# Altium PCB shkb_lite.PcbDoc (part 2 of 2)
Units mm, origin at the board's own origin, x right, y up, seen from the top; angles counter-clockwise.
Board outline 141.5 x 36 mm, 2 copper layers (Top Layer, Bottom Layer), stack 1.57 mm thick; 74 components, 53 nets, 368 pads, 293 vias.
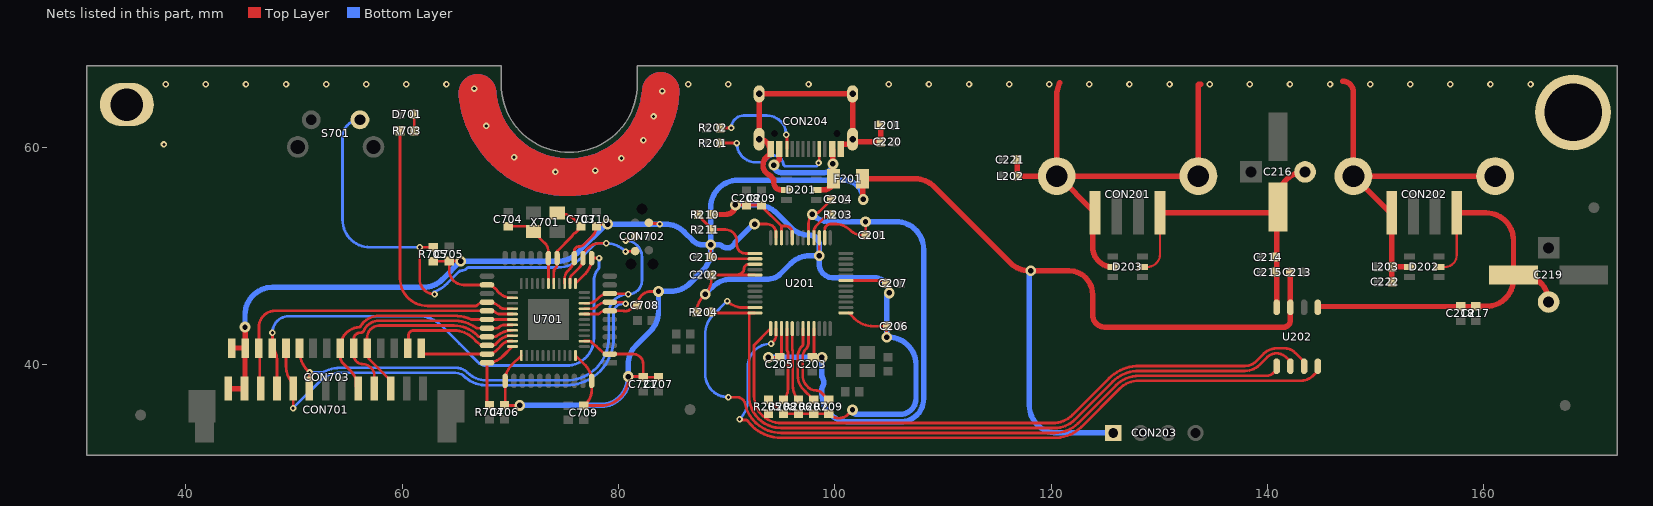
[diagram p2: the nets of this part, all layers, seen from the top]

## Via types
v1: diameter 0.6, hole 0.3, Top Layer to Bottom Layer, tented both sides, 262 vias
v2: diameter 1, hole 0.5, Top Layer to Bottom Layer, tented both sides, 22 vias
v3: diameter 0.6, hole 0.3, Top Layer to Bottom Layer, 9 vias

## Nets (pads, with @x,y where several pads share a name; then routed paths per layer and width w, separated by ;. In a path a pad name is that pad's centre, name@x,y a point inside that pad or via, vN(x,y) a via of type N, cw(c..) or ccw(c..) an arc to the next point about the centre after c; other vN are vias at no path point) (continued)
NetC703_2: C703.2 U701.16 X701.1 | length 9.1
  Top Layer w0.254: U701.16@74.015,47.467 74.015,48.526 cw(c74.537,48.526) 74.168,48.895 ccw(c73.812,49.251) 74.315,49.251 U701.16@74.315,49.817 74.362,49.864 74.362,50.486 75.665,51.789 ccw(c75.485,51.968) 75.713,51.857 cw(c76.327,51.562) 76.032,52.176 ccw(c75.921,52.404) 76.1,52.224 76.276,52.4 ccw(c76.096,52.579) 76.337,52.498 76.24,52.498 76.461,52.585 ccw(c76.275,52.771) C703.2@76.538,52.771 76.513,52.771 76.24,53.044 76.24,53.069 75.957,53.351 ccw(c74.473,51.867) 74.473,53.966 X701.1@74.336,53.966
NetC704_2: C704.2 U701.17 X701.3 | length 7.9
  Top Layer w0.254: C704.2@69.807,52.771 71.531,52.771 72.036,52.266 X701.3@72.136,52.266 73.173,51.23 cw(c72.345,50.402) 73.515,50.402 U701.17@73.515,49.817 U701.17@73.515,47.467
NetCON204_A5: CON204.A5 R201.1 | length 12.6
  Top Layer w0.254: R201.1@89.423,60.452 v1(90.932,60.452) ; v1@98.425,58.547 v1(98.495,58.617) 98.565,58.687 CON204.A5@98.565,59.9
  Bottom Layer w0.254: v1(90.932,60.452) ccw(c92.71,60.452) 90.99,60.002 ccw(c92.71,60.452) 92.258,58.732 ccw(c92.71,60.452) 92.71,58.674 93.347,58.674 ccw(c93.346,58.928) 93.573,58.813 cw(c94.361,58.42) 94.534,59.284 ; 94.361,59.301 cw(c94.361,58.42) 95.236,58.523 ccw(c95.488,58.554) 95.487,58.3 98.178,58.3 ccw(c98.178,58.617) v1(98.495,58.617)
NetCON204_B5: CON204.B5 R202.1 | length 9.1
  Top Layer w0.254: R202.1@89.408,61.849 v1(90.424,61.849) ; v1(95.504,61.214) cw(c95.504,61.153) 95.565,61.153 CON204.B5@95.565,59.9
  Bottom Layer w0.254: v1(90.424,61.849) cw(c91.567,61.849) 91.567,62.992 93.726,62.992 cw(c93.726,61.214) v1(95.504,61.214)
NetD701_2: D701.2 R703.2 | length 1.5
  Top Layer w0.254: R703.2@61.102,61.595 D701.2@61.102,63.119
NetR203_2: R203.2 U201.28 | length 3
  Top Layer w0.254: U201.28@98.065,51.698 98.065,52.26 cw(c98.882,52.26) 98.304,52.838 99.055,53.589 cw(c99.68,52.964) 99.069,53.603 cw(c99.68,52.964) R203.2@99.68,53.848
NetR206_1: R206.1 U201.5 | length 6.7
  Top Layer w0.254: U201.5@96.065,43.298 96.065,41.375 ccw(c96.319,41.376) 96.077,41.298 cw(c95.335,41.055) 96.116,41.055 96.116,38 ccw(c97.929,38) R206.1@96.647,36.718
NetR207_1: R207.1 U201.7 | length 7.3
  Top Layer w0.254: U201.7@97.065,43.298 97.065,41.877 cw(c96.811,41.877) 97.012,41.722 cw(c96.641,42.01) 96.972,41.677 ccw(c97.948,40.704) 96.785,41.443 ccw(c97.948,40.704) 96.595,40.964 ccw(c97.948,40.704) 96.57,40.704 96.57,38.937 ccw(c98.369,38.937) 97.096,37.666 ccw(c98.369,38.937) 97.098,37.664 ; 97.098,37.664 97.223,37.539 ; 97.223,37.539 ccw(c98.19,38.503) 97.225,37.537 ccw(c98.19,38.503) 97.305,37.463 cw(c97.141,37.27) 97.353,37.409 97.746,37.016 97.746,36.991 98.019,36.718 R207.1@98.044,36.718
NetR208_1: R208.1 U201.4 | length 7.3
  Top Layer w0.254: R208.1@95.25,36.718 ccw(c94.255,37.713) 95.662,37.713 95.662,41.055 ; U201.4@95.565,43.298 95.565,41.375 ccw(c95.819,41.376) 95.607,41.237 cw(c95.335,41.055) 95.662,41.055 ; 95.662,40.513 95.662,41.055
NetR209_1: R209.1 U201.8 | length 7.8
  Top Layer w0.254: U201.8@97.565,43.298 97.565,42.01 cw(c96.641,42.01) 97.295,41.358 ccw(c97.948,40.704) 97.024,40.704 97.024,38.937 ccw(c98.369,38.937) 97.418,37.986 97.545,37.859 ccw(c98.19,38.503) 98.19,37.592 cw(c98.19,36.741) 98.791,37.343 R209.1@99.28,36.855
NetR210_2: R210.2 R211.2 U201.37 | length 7.3
  Top Layer w0.254: R210.2@87.361,53.848 87.634,53.575 87.634,53.503 88.661,52.476 R211.2@88.661,52.451 89.871,52.451 cw(c89.871,51.39) 90.932,51.39 90.932,51.054 ccw(c91.738,51.054) 91.738,50.248 U201.37@92.615,50.248
NetR704_2: R704.2 U701.33 | length 6.9
  Top Layer w0.254: R704.2@68.072,36.21 67.84,36.442 U701.33@67.84,40.142 ccw(c67.84,42.194) 69.291,40.743 U701.33@70.19,41.642
OVCB1: R204.1 U201.48 U202.2 | length 69.9
  Top Layer w0.254: R204.1@88.534,44.831 88.617,44.748 U201.48@92.075,44.748 ; 92.091,36.765 ccw(c95.04,37.074) 95.04,34.109 120.344,34.109 ccw(c120.344,36.649) 122.14,34.853 125.664,38.377 cw(c128.104,35.941) 125.668,38.381 cw(c128.104,35.941) 127.87,39.381 cw(c128.071,36.849) 128.071,39.389 137.922,39.389 ccw(c137.922,41.275) 139.254,39.94 ccw(c137.922,41.275) 139.257,39.943 139.981,40.667 cw(c140.836,39.811) 140.836,41.021 cw(c140.836,39.811) 141.691,40.667 142.113,40.245 U202.2@142.113,39.82 ; U201.48@92.615,44.748 92.096,44.748 92.075,44.727 92.075,37.074 ccw(c95.04,37.074) 92.837,35.089 ccw(c95.04,37.074) 92.859,35.065 ; 93.319,34.659 ccw(c95.04,37.074) 94.554,34.149
OVCB2: R205.1 U201.1 U202.3 | length 62.5
  Top Layer w0.254: U201.1@94.065,43.298 92.529,41.762 92.529,37.074 ccw(c95.04,37.074) 95.04,34.563 120.156,34.563 ccw(c120.156,37.103) 121.952,35.307 125.342,38.697 cw(c128.104,35.941) 125.348,38.703 cw(c128.104,35.941) 127.836,39.834 cw(c128.071,36.849) 128.071,39.843 137.922,39.843 ccw(c137.922,41.275) 138.934,40.263 139.659,40.987 cw(c140.836,39.811) 139.661,40.989 cw(c140.836,39.811) 140.836,41.475 141.591,41.475 cw(c141.591,40.118) 142.55,41.077 143.383,40.245 U202.3@143.383,39.82
PB0: CON701.9 CON703.5 U701.8 | length 48.1
  Top Layer w0.254: CON703.5@49.255,41.502 49.255,39.837 ccw(c51.532,39.837) 49.922,38.227 CON701.9@49.922,37.749 49.916,37.744 49.916,35.946 v1(49.911,35.941) ; U701.8@76.84,45.142 77.503,45.142 ccw(c77.503,45.814) 77.978,45.339 cw(c78.951,44.366) 78.951,45.742 U701.8@79.19,45.742 80.402,45.742 80.551,45.593 v1(80.645,45.593)
  Bottom Layer w0.254: v1(49.911,35.941) 52.45,38.48 cw(c54.246,36.684) 54.246,39.224 64.574,39.224 cw(c64.574,36.259) 65.46,39.089 cw(c65.384,38.846) 65.517,39.063 cw(c64.95,38.148) 65.716,38.904 65.81,38.81 65.847,38.773 cw(c65.728,38.548) 65.891,38.743 ccw(c67.756,40.956) 67.282,38.101 ; 66.614,38.297 ccw(c67.756,40.956) 67.282,38.101 ; v1(80.645,45.593) 80.391,45.593 ccw(c80.391,44.742) 79.587,45.022 ccw(c79.828,44.94) 79.582,45.004 ccw(c80.899,44.669) 79.54,44.669 79.54,42.383 cw(c78.867,42.383) 79.54,42.361 ccw(c79.794,42.355) 79.54,42.359 cw(c75.184,42.418) 79.531,42.134 79.531,42.064 cw(c78.823,42.065) 79.51,41.896 ccw(c79.757,41.836) 79.505,41.87 cw(c75.184,42.418) 75.184,38.062 67.568,38.062 cw(c67.568,38.516) 67.471,38.073 67.453,38.076 ccw(c67.399,37.828) 67.426,38.081 cw(c67.756,40.956) 67.282,38.101
PB1: CON701.8 CON702.3 CON703.6 U701.9 | length 51.7
  Top Layer w0.254: CON703.6@50.505,40.831 CON703.6@50.505,41.226 ; CON703.6@50.505,41.502 CON703.6@50.505,41.226 ; CON701.8@51.422,37.749 51.428,37.756 51.428,39.223 v1@51.422,39.23 ; v1(51.435,39.243) 51.248,39.43 cw(c53.045,41.226) CON703.6@50.505,41.226 ; U701.9@76.84,45.642 77.177,45.642 ccw(c77.177,46.775) 77.978,45.974 78.091,46.087 cw(c79.19,44.987) U701.9@79.19,46.542 79.22,46.512 80.869,46.512 v1(80.899,46.482) ; v1(80.645,51.435) ccw(c80.645,52.661) 81.512,51.794 CON702.3@81.534,51.816
  Bottom Layer w0.254: v1(51.435,39.243) 52.623,39.243 ccw(c52.622,39.497) 52.749,39.277 cw(c54.246,36.684) 54.246,39.678 64.762,39.678 cw(c64.762,36.682) 65.399,39.609 cw(c65.345,39.361) 65.423,39.603 cw(c64.95,38.148) 66.035,39.227 ccw(c67.756,40.956) 67.512,38.528 67.568,38.516 68.027,38.516 ccw(c68.03,40.977) 68.03,38.516 68.032,38.516 75.184,38.516 ccw(c75.184,42.418) 79.061,41.977 ccw(c78.823,42.065) 79.077,42.064 79.077,42.142 cw(c79.331,42.141) 79.077,42.157 ccw(c75.184,42.418) 79.086,42.37 cw(c79.34,42.365) 79.086,42.374 ccw(c78.867,42.383) 79.086,42.383 79.086,44.669 cw(c80.899,44.669) v1(80.899,46.482) ccw(c80.899,47.752) 82.169,47.752 82.169,49.911 ccw(c80.645,49.911) v1(80.645,51.435)
PB4: CON701.5 CON703.9 U701.28 | length 22.9
  Top Layer w0.254: U701.28@70.19,44.142 U701.28@67.84,44.142 66.447,44.142 cw(c66.448,44.396) 66.348,44.163 ccw(c64.788,40.586) 64.788,44.488 57.881,44.488 ccw(c57.881,42.454) 56.509,43.956 56.485,43.934 ccw(c56.655,43.745) 56.475,43.925 56.445,43.895 ccw(c57.881,42.454) 56.107,43.449 cw(c56.011,43.684) 56.027,43.431 ccw(c56.134,41.555) 54.398,42.275 54.255,41.555 CON703.9@54.255,41.502 54.255,40.773 ccw(c55.251,40.773) 54.546,40.069 55.123,39.492 55.254,39.361 cw(c53.642,37.749) CON701.5@55.699,38.733 ; CON701.5@55.699,38.733 cw(c53.642,37.749) CON701.5@55.922,37.749 55.699,37.972 CON701.5@55.699,38.733
PB5: CON701.4 CON703.10 U701.29 | length 22.2
  Top Layer w0.254: CON701.4@57.422,38.124 57.422,38.989 ccw(c56.533,38.989) 57.161,39.617 57.046,39.732 ccw(c56.388,39.074) 57.045,39.733 ccw(c56.388,39.074) 56.388,40.005 cw(c56.388,40.888) 55.505,40.888 CON703.10@55.505,41.502 55.505,42.297 cw(c56.134,42.297) 56.134,42.926 56.198,42.926 ccw(c56.196,43.18) 56.429,43.079 cw(c57.881,42.454) 57.881,44.034 64.788,44.034 cw(c64.788,40.586) 66.347,43.662 ; 65.224,44.006 cw(c64.788,40.586) 66.347,43.662 ; U701.29@70.19,43.642 69.464,43.642 ccw(c69.464,42.931) 68.961,43.434 cw(c68.739,43.656) 68.739,43.342 U701.29@67.84,43.342 66.942,43.342 cw(c66.943,43.596) 66.796,43.389 ccw(c64.788,40.586) 66.759,43.415 ccw(c64.788,40.586) 66.347,43.662
PB6: CON701.3 CON703.11 U701.30 | length 21.3
  Top Layer w0.254: CON701.3@58.922,37.749 58.922,38.499 56.977,40.444 cw(c57.514,40.981) 56.755,40.981 CON703.11@56.755,41.502 56.755,42.454 cw(c57.881,42.454) 57.881,43.58 64.788,43.58 cw(c64.788,40.586) 66.904,42.704 cw(c64.788,40.586) 66.906,42.703 ; 65.885,43.372 cw(c64.788,40.586) 66.906,42.703 ; U701.30@70.19,43.142 ccw(c70.19,41.616) 69.837,43.101 cw(c69.779,43.348) 69.784,43.094 ccw(c69.79,42.642) 69.673,43.079 cw(c69.608,43.324) 69.657,43.075 ccw(c69.883,41.877) 69.269,42.93 cw(c69.142,43.15) 69.242,42.917 ccw(c69.902,41.35) 69.011,42.798 ccw(c69.902,41.35) 68.815,42.657 cw(c68.654,42.853) 68.762,42.624 cw(c68.394,43.414) 68.394,42.542 U701.30@67.84,42.542 67.171,42.542 cw(c67.171,42.796) 67.024,42.589 cw(c67.171,42.796) 66.992,42.616 66.906,42.703
PB7: CON701.10 CON703.4 U701.12 | length 50.1
  Top Layer w0.254: CON703.4@48.005,41.502 cw(c46.998,40.496) 48.422,40.496 CON701.10@48.422,37.749 ; CON703.4@48.005,41.503 v1(48.006,42.926) ; U701.12@76.015,47.467 76.914,48.366 ccw(c75.463,49.817) U701.12@77.515,49.817 77.521,49.822 v1(78.201,49.822)
  Bottom Layer w0.254: v1(48.006,42.926) cw(c49.53,42.926) 49.53,44.45 61.498,44.45 cw(c61.498,41.456) 63.614,43.574 cw(c61.498,41.456) 63.616,43.572 65.278,41.91 66.995,40.193 ccw(c67.756,40.956) 67.756,39.878 75.184,39.878 ccw(c75.184,42.418) 77.724,42.418 77.724,47.698 cw(c79.502,47.698) 78.142,48.843 ; 78.142,48.844 ccw(c77.947,49.006) 78.201,49.005 v1(78.201,49.822)
PC6: CON703.14 U701.31 | length 11.9
  Top Layer w0.254: CON703.14@60.505,41.502 60.579,41.577 60.579,42.672 cw(c61.033,42.672) 61.033,43.126 64.788,43.126 cw(c64.788,40.586) 66.584,42.382 66.88,42.086 ccw(c67.71,42.915) 67.381,41.789 ccw(c67.71,42.915) 67.71,41.742 U701.31@67.796,41.742 ; U701.31@67.84,41.742 U701.31@67.796,41.742 ; U701.31@70.19,42.642 69.883,42.642 ccw(c69.883,41.877) 69.479,42.527 cw(c69.346,42.743) 69.441,42.508 ccw(c69.902,41.35) 69.098,42.302 ccw(c69.902,41.35) 69.02,42.23 68.65,41.861 cw(c68.471,42.041) 68.471,41.787 67.806,41.787 ccw(c67.808,41.533) 67.796,41.786 U701.31@67.796,41.742
PC7: CON703.15 U701.32 | length 9.3
  Top Layer w0.254: CON703.15@61.755,41.502 61.755,41.165 61.978,40.942 U701.32@67.84,40.942 ccw(c67.84,42.231) 68.752,41.32 69.342,41.91 cw(c69.902,41.35) 69.902,42.142 U701.32@70.19,42.142
PD6: R703.1 U701.26 | length 25.7
  Top Layer w0.254: R703.1@59.802,61.595 59.802,47.936 ccw(c62.342,47.936) 62.342,45.396 66.76,45.396 ccw(c66.76,45.635) 66.929,45.466 cw(c67.596,44.799) 67.596,45.742 U701.26@67.84,45.742 67.937,45.742 cw(c67.937,44.188) 69.036,45.287 ccw(c69.385,45.636) 69.385,45.142 U701.26@70.19,45.142
PD7: CON701.11 CON703.3 U701.27 | length 30.1
  Top Layer w0.254: CON701.11@46.922,37.749 46.838,37.833 46.838,41.419 CON703.3@46.755,41.502 46.755,43.453 cw(c48.244,43.453) 48.244,44.942 U701.27@67.84,44.942 68.312,44.942 cw(c68.312,44.563) 68.58,44.831 ccw(c69.036,45.287) 69.036,44.642 U701.27@70.19,44.642
PORT1_PWR: C214.2 C215.2 C216.1 CON201.1 D203.5 U202.8 | length 31.1
  Top Layer w0.203: D203.5@128.433,49 128.893,49 ccw(c128.893,50.165) 130.058,50.165 CON201.1@130.058,54
  Top Layer w0.5: CON201.1@130.058,54 C216.1@140.843,54 ; U202.8@140.843,45.27 C216.1@140.843,54 ; C216.1@140.97,54.102 140.868,54 C216.1@140.843,54 ; C216.1@143.47,57.785 ccw(c143.47,55.285) 140.97,55.285 C216.1@140.97,54.535 140.843,54.408 C216.1@140.843,54
PORT2_PWR: C217.2 C218.2 C219.1 CON202.1 D202.5 U202.5 | length 40.7
  Top Layer w0.203: D202.5@155.868,49 156.411,49 ccw(c156.411,50.083) 157.493,50.083 CON202.1@157.493,54
  Top Layer w0.5: U202.5@144.653,45.27 144.653,45.293 144.699,45.339 C217.2@159.258,45.339 ; CON202.1@157.493,54 160.199,54 cw(c160.199,51.46) 162.739,51.46 C219.1@162.739,48.26 ; C217.2@159.258,45.354 160.199,45.354 ccw(c160.199,47.894) 162.739,47.894 C219.1@162.739,48.26 ; C219.1@165.989,45.76 ccw(c163.489,45.76) 163.489,48.26 C219.1@162.739,48.26
PWRB1: U201.47 U202.1 | length 68.3
  Top Layer w0.254: v1(90.043,45.847) ccw(c91.489,47.293) 91.489,45.248 U201.47@92.615,45.248 ; v1(90.162,36.958) 90.906,36.958 cw(c90.906,36.102) 91.026,36.95 cw(c90.906,36.102) 91.651,36.524 cw(c91.429,36.4) 91.679,36.447 ; 91.679,36.447 ccw(c95.04,37.074) 91.762,36.102 ccw(c95.04,37.074) 92.329,34.991 ccw(c95.04,37.074) 92.511,34.773 ccw(c95.04,37.074) 95.04,33.655 120.344,33.655 ccw(c120.344,36.649) 122.46,34.531 ccw(c120.344,36.649) 122.462,34.533 125.987,38.057 cw(c128.104,35.941) 125.988,38.059 cw(c128.104,35.941) 128.104,38.935 139.898,38.935 ccw(c139.898,39.88) 140.566,39.212 140.843,39.489 U202.1@140.843,39.82
  Bottom Layer w0.254: v1(90.043,45.847) 88.755,44.559 ccw(c90.551,42.763) 88.011,42.763 88.011,39.109 ccw(c90.162,39.109) v1(90.162,36.958)
PWRB2: U201.2 U202.4 | length 69.5
  Top Layer w0.254: v1(91.186,34.925) 91.252,34.859 91.734,34.859 cw(c91.733,34.605) 91.936,34.757 ccw(c95.04,37.074) 92.176,34.467 ; 92.176,34.467 ccw(c95.04,37.074) 94.286,33.275 ; 92.182,34.46 ccw(c95.04,37.074) 95.04,33.201 120.414,33.201 ccw(c120.414,35.741) 120.833,33.236 cw(c120.873,32.985) 120.837,33.236 ccw(c120.344,36.649) 122.78,34.209 ccw(c120.344,36.649) 122.784,34.213 126.308,37.737 cw(c128.104,35.941) 128.104,38.481 143.093,38.481 ccw(c143.093,40.041) 144.196,38.938 144.653,39.395 U202.4@144.653,39.82 ; 94.332,42.135 ccw(c93.768,42.698) 94.556,42.58 ; 94.556,42.58 ccw(c93.768,42.698) 94.565,42.698 U201.2@94.565,43.298 94.556,43.289 94.556,42.58
  Bottom Layer w0.254: v1(91.186,34.925) 91.204,34.943 ccw(c89.408,36.739) 91.948,36.739 91.948,39.751 cw(c94.107,39.751) 92.493,41.185 cw(c94.107,39.751) 92.673,41.365 cw(c94.107,39.751) v1(94.107,41.91)
RAW: CON204.A4B9 CON204.B4A9 D201.5 F201.2 | length 13.1
  Top Layer w0.5: v2(94.361,58.42) 94.815,58.874 ccw(c94.694,58.995) 94.865,58.995 CON204.B4A9@94.865,59.9 CON204.B4A9@94.815,59.85 ; D201.5@98.276,56.134 99.011,56.134 ccw(c99.011,56.992) 99.869,56.992 F201.2@99.869,57.15 99.815,57.204 v2(99.815,58.527) 99.815,59.85 CON204.A4B9@99.765,59.9
  Bottom Layer w0.5: v2(94.361,58.42) ccw(c95.058,58.42) 95.058,57.723 99.011,57.723 ccw(c99.011,58.527) v2(99.815,58.527)
RST: CON702.5 R705.1 S701.1 U701.13 | length 51.2
  Top Layer w0.254: R705.1@62.873,50.82 v1(61.615,50.82) 61.615,47.859 ccw(c62.992,47.859) v1(62.992,46.482) ; U701.13@75.515,47.467 75.515,47.834 cw(c76.118,47.834) 75.692,48.26 76.338,48.906 ccw(c75.427,49.817) U701.13@76.715,49.817 76.715,50.258 77.24,50.783 cw(c78.201,49.822) 78.201,51.181 v1(78.867,51.181) ; v1(80.645,50.419) 80.669,50.443 81.51,50.443 CON702.5@81.534,50.466
  Bottom Layer w0.254: S701.1@56.093,62.602 ccw(c56.093,60.992) 54.483,60.992 54.483,53.36 ccw(c57.023,53.36) 57.023,50.82 v1(61.615,50.82) ; v1@62.919,46.698 ccw(c61.94,49.657) 64.145,47.454 65.267,48.576 cw(c65.446,48.396) 65.436,48.65 ccw(c65.405,49.53) 66.005,48.885 cw(c66.178,48.699) 66.177,48.953 74.386,48.953 ccw(c74.386,52.07) 76.591,49.867 77.831,51.107 cw(c78.01,50.927) 78.01,51.181 v1(78.867,51.181) cw(c78.867,48.728) 80.601,50.463 v1(80.645,50.419)
SHIELD: C220.2 C221.2 C222.2 CON201.4 CON201.5 CON202.4 CON202.5 CON204.A1B12 CON204.B1A12 CON204.S1 D201.2 D202.2 D203.2 L201.2 L202.2 L203.2 pad. | length 162.4
  Top Layer w0.5: 94.996,56.134 cw(c94.996,56.769) 94.361,56.769 94.361,56.895 ccw(c93.861,56.895) 94.215,57.247 94.028,57.435 ccw(c93.673,57.083) 93.902,57.527 cw(c94.361,58.42) 93.774,59.235 ccw(c93.48,59.639) 93.98,59.637 93.98,59.83 ccw(c92.995,59.83) 93.827,60.357 ccw(c92.995,59.83) CON204.S1@92.995,60.815 CON204.S1@92.995,64.995 CON204.S1@101.635,64.995 CON204.S1@101.635,60.815 ; CON204.A1B12@100.565,59.9 100.565,60.307 100.615,60.357 101.404,60.357 101.635,60.588 CON204.S1@101.635,60.815 ; L201.2@104.252,62.103 C220.2@104.252,60.579 101.871,60.579 cw(c101.871,60.815) CON204.S1@101.635,60.815 ; C221.2@116.855,58.928 L202.2@116.855,57.404 116.855,57.4 CON201.5@120.508,57.4 ; 120.777,66.04 120.508,65.152 CON201.5@120.508,57.4 ; D203.2@125.683,49 cw(c125.683,50.856) 123.827,50.856 123.827,54.231 120.764,57.294 ccw(c120.508,57.038) CON201.5@120.508,57.4 ; 133.849,65.892 133.752,65.892 cw(c133.752,65.913) 133.731,65.913 ccw(c133.731,65.79) 133.608,65.79 CON201.5@133.608,57.4 CON201.5@120.508,57.4 ; 146.939,66.167 cw(c146.939,65.163) 147.943,65.163 CON202.5@147.943,57.4 ; C222.2@151.526,47.498 cw(c151.526,47.531) 151.493,47.531 CON202.4@151.493,54 cw(c151.493,54.362) 151.237,54.106 CON202.5@147.943,57.4 ; L203.2@151.526,48.895 cw(c151.631,48.895) 151.631,49 D202.2@153.118,49 ; CON202.5@161.043,57.4 CON202.5@147.943,57.4
  Top Layer w3.5: 66.95,65.076 ccw(c75.42,65.791) v1@83.904,65.265
  Bottom Layer w3.5: 66.95,65.076 ccw(c75.42,65.791) v1@83.904,65.265
  other v1: 74.168,57.785 77.851,57.912 80.264,59.055 70.34,59.136 37.973,60.325 82.296,60.706 67.775,62.032 83.244,62.921 84.031,65.257 66.657,65.486 38.133,65.892 41.842,65.892 45.55,65.892 49.258,65.892 52.967,65.892 56.675,65.892 60.384,65.892 64.092,65.892 86.444,65.892 90.152,65.892 97.569,65.892 104.986,65.892 108.694,65.892 112.403,65.892 116.111,65.892 119.82,65.892 123.528,65.892 127.236,65.892 130.945,65.892 134.653,65.892 138.362,65.892 142.07,65.892 145.778,65.892 149.487,65.892 153.195,65.892 156.904,65.892 160.612,65.892 164.32,65.892
VCC1V8: C201.2 C203.2 C204.2 C205.2 U201.3 U201.9 U201.26 U201.29 | length 64.4
  Top Layer w0.254: v2(93.853,40.64) 94.895,40.64 ccw(c94.485,41.05) C205.2@94.91,40.655 ccw(c94.485,41.05) 95.065,41.05 U201.3@95.065,43.298 ; U201.29@97.565,51.698 97.565,53.034 cw(c98.731,53.034) v2(97.907,53.858) ccw(c97.907,54.792) 98.567,54.132 C204.2@99.68,55.245 ; C203.2@97.932,40.64 v2(98.806,40.64) ; C203.2@98.065,40.675 U201.9@98.065,43.298 ; U201.26@99.065,51.698 99.074,51.707 99.074,52.47 cw(c99.563,52.47) 99.563,52.959 100.12,52.959 cw(c100.12,51.225) 101.346,52.451 ccw(c102.572,53.677) 102.572,51.943 C201.2@102.855,51.943 ; C201.2@102.845,51.953 v2@102.845,53.173
  Top Layer w0.5: v2(102.834,53.184) v2@102.845,53.173 ; C201.2@102.845,51.953 C201.2@102.855,51.943
  Bottom Layer w0.5: v2(93.853,40.64) v2(98.806,40.64) 98.806,38.856 ccw(c99.249,39.087) 98.835,38.807 cw(c98.171,38.354) 98.87,37.957 ccw(c99.306,37.712) 98.806,37.714 98.806,37.211 ccw(c101.346,37.211) 101.078,34.685 ccw(c101.346,37.211) 101.346,34.671 106.045,34.671 ccw(c106.045,36.83) 108.204,36.83 108.204,50.644 ccw(c105.664,50.644) 105.664,53.184 v2(102.834,53.184) 99.535,53.184 cw(c99.535,55.487) v2(97.907,53.858)
VCC3V3: C202.2 C206.2 C207.2 C208.2 C209.2 R204.2 R205.2 R206.2 R207.2 R208.2 R209.2 R210.1 U201.13 U201.19 U201.27 U201.32 U201.34 U201.39 U201.41 | length 89
  Top Layer w0.254: R204.2@87.234,44.831 cw(c89.344,44.831) 87.852,46.323 v2(88.011,46.482) ccw(c86.649,47.844) 88.575,47.844 C202.2@88.575,48.26 ; C202.2@88.702,48.387 88.832,48.257 90.864,48.257 ; v2(90.805,54.737) 90.805,54.722 C208.2@91.821,54.722 C209.2@93.218,54.722 ccw(c93.462,54.722) 93.289,54.55 95.065,52.774 ; U201.41@92.615,48.248 92.606,48.257 90.864,48.257 ; U201.39@92.615,49.248 92.032,49.248 ccw(c92.032,48.808) 91.891,49.225 ccw(c92.032,48.808) 91.852,49.21 ccw(c92.032,48.808) 91.592,48.808 ccw(c92.065,48.748) 91.588,48.765 cw(c91.334,48.774) 91.584,48.726 cw(c91.164,48.809) 91.467,48.506 cw(c90.864,49.108) 90.864,48.257 ; R205.2@93.853,36.718 cw(c93.853,36.484) 93.88,36.716 cw(c93.853,36.484) 94.018,36.65 R208.2@95.25,35.418 R206.2@96.647,35.418 R207.2@98.044,35.418 R209.2@99.441,35.418 99.471,35.388 ccw(c100.367,36.284) 99.633,35.251 ccw(c100.367,36.284) 100.367,35.017 ccw(c100.367,36.223) 101.22,35.37 ; U201.34@95.065,51.698 95.065,52.774 ; U201.32@96.065,51.698 cw(c96.296,51.804) 96.056,51.72 cw(c96.296,51.804) 96.042,51.802 96.042,52.248 ccw(c95.565,52.248) 95.903,52.585 ccw(c95.565,52.248) 95.902,52.586 ccw(c95.565,52.248) 95.894,52.593 cw(c96.071,52.776) 95.885,52.603 ccw(c95.471,52.189) 95.471,52.774 95.065,52.774 ; v2(98.552,50.038) 98.558,50.044 98.558,51.692 U201.27@98.565,51.698 ; U201.19@101.015,47.748 104.51,47.748 C207.2@104.76,47.498 105.033,47.225 v2(105.033,46.605) ; 101.22,35.37 v2(101.632,35.782) ; U201.13@101.29,44.748 101.777,44.261 ccw(c103.573,46.057) 102.604,43.709 ccw(c103.573,46.057) 103.573,43.517 C206.2@104.775,43.517 ; 104.775,43.053 C206.2@104.775,43.517 ; C206.2@104.83,43.517 C206.2@104.775,43.517
  Top Layer w0.5: R210.1@88.661,53.848 89.916,53.848 ccw(c89.916,54.737) v2@90.805,54.722
  Bottom Layer w0.5: v2(88.011,46.482) 88.664,47.135 cw(c90.46,45.339) 89.408,47.651 cw(c90.46,45.339) 90.46,47.879 93.852,47.879 ccw(c93.852,49.404) 94.93,48.326 95.899,49.294 cw(c97.695,47.498) 97.695,50.038 v2(98.552,50.038) ; 91.313,54.737 92.801,54.737 cw(c92.801,52.197) 94.597,53.993 95.929,52.661 ccw(c97.663,54.396) 97.663,51.943 cw(c97.663,51.054) 98.552,51.054 v2(98.552,50.038) ; v2(101.632,35.782) ccw(c102.043,35.782) 102.043,35.371 106.045,35.371 ccw(c106.045,36.83) 107.504,36.83 107.504,39.961 ccw(c104.964,39.961) 104.964,42.501 v2(104.804,42.501) 104.804,46.376 cw(c105.033,46.376) v2(105.033,46.605) ccw(c103.632,46.605) 103.632,48.006 99.822,48.006 cw(c99.822,49.276) 98.827,48.486 cw(c99.822,49.276) 98.552,49.276 v2(98.552,50.038)
VCC5V: C210.2 C213.2 C705.2 C706.2 C707.2 C708.2 C709.2 C710.2 C721.2 CON203.1 CON701.12 CON701.13 CON702.2 CON703.1 CON703.2 F201.1 R705.2 U201.35 U201.38 U202.7 U701.2 U701.7 U701.14 U701.24 U701.34 U701.44 | length 248.3
  Top Layer w0.254: R705.2@62.873,49.52 62.883,49.53 64.331,49.53 C705.2@64.346,49.545 ; v2(65.405,49.53) 65.39,49.545 C705.2@64.346,49.545 ; U701.24@70.19,46.142 70.088,46.142 cw(c70.088,47.736) 68.961,46.609 68.821,46.749 cw(c69.001,46.928) 68.777,46.809 ccw(c68.265,46.542) 68.53,47.055 cw(c68.648,47.28) 68.477,47.092 ccw(c67.84,46.407) U701.24@67.84,47.342 65.688,47.342 cw(c65.688,48.684) 64.346,48.684 C705.2@64.346,49.545 ; v2(70.866,36.195) 69.484,36.195 C706.2@69.469,36.21 69.515,36.256 U701.34@69.515,38.467 cw(c71.567,38.467) 70.116,39.918 U701.34@71.015,40.817 ; U701.14@75.015,47.467 75.015,47.927 cw(c76.025,47.927) 75.311,48.641 75.511,48.841 ccw(c74.535,49.817) U701.14@75.915,49.817 75.915,50.474 cw(c76.323,50.474) 76.034,50.761 cw(c76.323,50.474) 76.323,50.881 76.327,50.881 ccw(c76.327,51.562) 76.808,51.08 ; U701.44@76.015,40.817 76.914,39.918 cw(c75.463,38.467) U701.44@77.515,38.467 77.515,37.574 cw(c75.837,37.574) C709.2@77.024,36.388 ; C709.2@76.792,36.18 C709.2@76.817,36.18 ; 76.809,51.08 77.579,51.851 ; U701.2@76.84,42.142 77.291,42.142 cw(c77.291,41.888) 77.471,42.067 77.537,42.001 ccw(c79.19,43.651) 77.977,41.655 78.336,41.296 ccw(c79.19,42.15) U701.2@79.19,40.942 81.359,40.942 cw(c81.359,40.023) 82.278,40.023 C721.2@82.278,38.806 ; U701.7@76.84,44.642 78.083,44.642 ccw(c78.083,44.853) 78.232,44.704 cw(c78.807,44.129) 78.807,44.942 U701.7@79.19,44.942 80.419,44.942 cw(c80.409,44.688) 80.473,44.934 ccw(c80.645,45.593) 80.645,44.912 ccw(c80.645,45.593) 81.182,45.174 cw(c81.381,45.017) 81.201,45.195 81.301,45.296 cw(c81.48,45.115) 81.48,45.369 81.482,45.369 81.746,45.491 C708.2@81.755,45.496 ; C709.2@77.024,36.387 C709.2@76.817,36.18 ; 77.58,51.852 ccw(c76.66,52.771) 77.662,51.943 ccw(c76.66,52.771) C710.2@77.96,52.771 78.148,52.959 v2(78.994,52.959) ; C708.2@81.755,45.471 cw(c83.021,45.471) 81.756,45.496 cw(c83.021,45.471) 83.021,46.736 v2(83.693,46.736) ; CON702.2@82.804,53.086 82.867,53.023 83.757,53.023 v1(83.82,52.959) ; C707.2@83.701,38.806 C721.2@82.278,38.806 ; v2(88.519,51.054) 88.519,49.967 88.586,49.947 C210.2@88.848,49.869 ; C210.2@88.575,49.911 ccw(c88.969,50.305) 88.969,49.748 U201.38@92.615,49.748 ; v2(92.583,52.959) 93.726,52.959 cw(c93.726,52.12) 94.501,52.443 cw(c94.065,52.248) 94.52,52.39 cw(c93.726,52.12) 94.565,52.12 U201.35@94.565,51.698 ; C709.2@76.817,36.18 78.359,36.18 ccw(c78.359,38.72) 80.899,38.72 v2(80.899,38.862) 82.222,38.862 C721.2@82.278,38.806
  Top Layer w0.5: CON701.13@43.922,37.749 CON701.12@45.422,37.749 45.463,37.791 45.463,41.461 CON703.2@45.505,41.502 ; CON703.1@44.255,41.502 CON703.2@45.505,41.502 ; v2(45.466,43.434) 45.485,43.415 45.485,41.522 CON703.2@45.505,41.502 ; v2(102.616,55.245) 102.569,55.292 F201.1@102.569,57.15 107.406,57.15 cw(c107.406,54.61) 109.202,56.406 116.223,49.385 ccw(c118.019,51.181) 118.019,48.641 v2(118.11,48.641) 121.645,48.641 cw(c121.645,46.461) 123.825,46.461 123.825,44.577 ccw(c124.968,44.577) 124.403,43.584 ccw(c124.968,44.577) 124.968,43.434 141.484,43.434 ccw(c141.484,44.063) 142.113,44.063 U202.7@142.113,45.27 142.105,45.277 142.105,48.507 C213.2@142.098,48.514
  Bottom Layer w0.5: v2(45.466,43.434) 45.466,44.577 cw(c48.006,44.577) 48.006,47.117 61.94,47.117 ccw(c61.94,49.657) 63.736,47.861 v2(65.405,49.53) 74.386,49.53 ccw(c74.386,52.07) 76.182,50.274 78.867,52.959 v2(78.994,52.959) v1(83.82,52.959) 84.328,52.959 cw(c84.328,50.506) 86.062,52.241 86.868,51.435 ccw(c87.788,52.355) 87.788,51.054 v2(88.519,51.054) ; v2(70.866,36.195) 78.359,36.195 ccw(c78.359,38.735) 80.899,38.735 v2(80.899,38.862) 80.899,39.969 cw(c83.439,39.969) 81.643,41.765 82.949,43.071 ccw(c81.153,44.867) 83.693,44.867 v2(83.693,46.736) 84.8,46.736 ccw(c84.8,49.276) 86.596,47.48 87.775,48.659 ccw(c85.979,50.455) 88.519,50.455 v2(88.519,51.054) ; v2(92.583,52.959) ccw(c92.7,52.473) 92.348,52.827 90.858,51.337 ccw(c91.213,50.985) 90.765,51.208 cw(c90.043,51.562) 89.532,50.941 ccw(c89.216,50.554) 89.217,51.054 v2(88.519,51.054) ; v2(102.616,55.245) ccw(c100.838,55.245) 100.838,57.023 91.059,57.023 ccw(c91.059,54.483) 90.791,57.009 ccw(c91.059,54.483) 88.533,54.751 ccw(c91.059,54.483) 88.519,54.483 v2(88.519,51.054) ; v2(118.11,48.641) ccw(c118.11,48.514) 117.983,48.514 117.983,36.195 ccw(c120.523,36.195) 120.523,33.655 CON203.1@125.73,33.655
pads on no net: CON204. CON204.A8 CON204.B8 CON702.0 D201.1 D201.6 D202.1 D202.6 D203.1 D203.6 FID1.0 FID2.0 FID3.0 FID4.0 U201.36 U201.43 U201.44 U201.45 U201.46 U701.1 U701.18 U701.19 U701.20 U701.21 U701.22 U701.25 U701.36 U701.37 U701.38 U701.39 U701.40 U701.41

## Polygon pours and split planes (outlines as drawn)
GND on Bottom Layer "Bottom Layer-GND" (solid, remove dead copper, pour order 0): 30.843,31.602 30.843,67.602 69.143,67.602 69.143,65.902 ccw(c75.443,65.902) 75.443,59.602 ccw(c75.443,65.902) 81.743,65.902 81.743,67.602 172.344,67.602 172.344,31.602
GND on Top Layer "Top Layer-GND" (solid, remove dead copper, pour order 1): 30.843,31.602 30.843,67.602 69.143,67.602 69.143,65.902 ccw(c75.443,65.902) 75.443,59.602 ccw(c75.443,65.902) 81.743,65.902 81.743,67.602 172.344,67.602 172.344,31.602

## Other copper
Top Layer:
  region net SHIELD: 171.966,56.342 171.966,67.086 162.433,67.086 162.433,56.342
  rectangle net SHIELD: 82.126,64.902 171.966,67.061
  rectangle net SHIELD: 31.377,64.902 68.715,67.061
  rectangle net SHIELD: 31.377,59.796 41.664,67.061
  pour cut-out: 64.857,64.9 ccw(c75.42,65.791) 86,65.135 ccw(c83.904,65.265) 86.004,65.265 ccw(c83.904,65.265) 81.808,65.395 cw(c75.42,65.791) 69.043,65.253 ccw(c66.95,65.076)
  pour cut-out: 40.318,64.597 40.318,67.602 171.919,67.602 171.919,64.597
  pour cut-out: 29.726,68.763 29.777,68.813 41.918,68.813 41.918,59.436 29.715,59.436
  pour cut-out: 172.169,56.088 147.077,56.088 147.077,66.35 172.169,66.35
  pour cut-out: 134.498,55.858 119.639,55.858 119.639,65.902 134.498,65.902
Bottom Layer:
  rectangle net SHIELD: 31.377,59.796 41.664,67.061
  rectangle net SHIELD: 31.377,64.902 68.715,67.061
  rectangle net SHIELD: 82.126,64.902 171.966,67.061
  region net SHIELD: 171.966,56.342 171.966,67.086 162.433,67.086 162.433,56.342
  pour cut-out: 64.857,64.9 ccw(c75.42,65.791) 86,65.135 ccw(c83.904,65.265) 86.004,65.265 ccw(c83.904,65.265) 81.808,65.395 cw(c75.42,65.791) 69.043,65.253 ccw(c66.95,65.076)
  pour cut-out: 172.169,56.088 147.077,56.088 147.077,66.35 172.169,66.35
  pour cut-out: 134.498,55.858 119.639,55.858 119.639,65.902 134.498,65.902
  pour cut-out: 40.318,64.597 40.318,67.602 171.919,67.602 171.919,64.597
  pour cut-out: 29.726,68.763 29.777,68.813 41.918,68.813 41.918,59.436 29.715,59.436

## Silkscreen, mask and mechanical layers (free items; w line width, h text height)
Top Overlay:
  drawing of 2 lines, arcs and shapes, not listed
  text "SKHB Lite" at 36.703,48.387 h3.3
  text "Rev A1 - C" at 38.735,46.736 h2
  text "VCC" at 125.349,37.719 h0.75 r270
  text "GND" at 132.969,37.719 h0.75 r270
  text "DN" at 127.762,36.957 h0.75 r270
  text "DP" at 130.429,36.957 h0.75 r270
  text "Port is unprotected  / use with care" at 103.159,32.512 h0.75
outline:
  the board outline again, w0.1

## Text inside footprints (layer, text, board x,y; h text height)
C216: Top Overlay "+" at 142.646,60.833 h1.52 r270; Top Overlay "-" at 137.719,55.728 h1.52 r270
C219: Top Overlay "-" at 163.932,51.511 h1.52 r180; Top Overlay "+" at 169.037,46.584 h1.52 r180
CON204: Mechanical 15 "connector edge" at 100.265,67.15 h1 r180